# Altium PCB Board.PcbDoc
Units mm, origin at the board's own origin, x right, y up, seen from the top; angles counter-clockwise.
Board outline 100.3 x 90.3 mm, 4 copper layers (L1 (SIGNAL), L2 (GND), L3 (GND), L4 (SIGNAL)), stack 1.586 mm thick; 32 components, 20 nets, 173 pads, 66 vias.
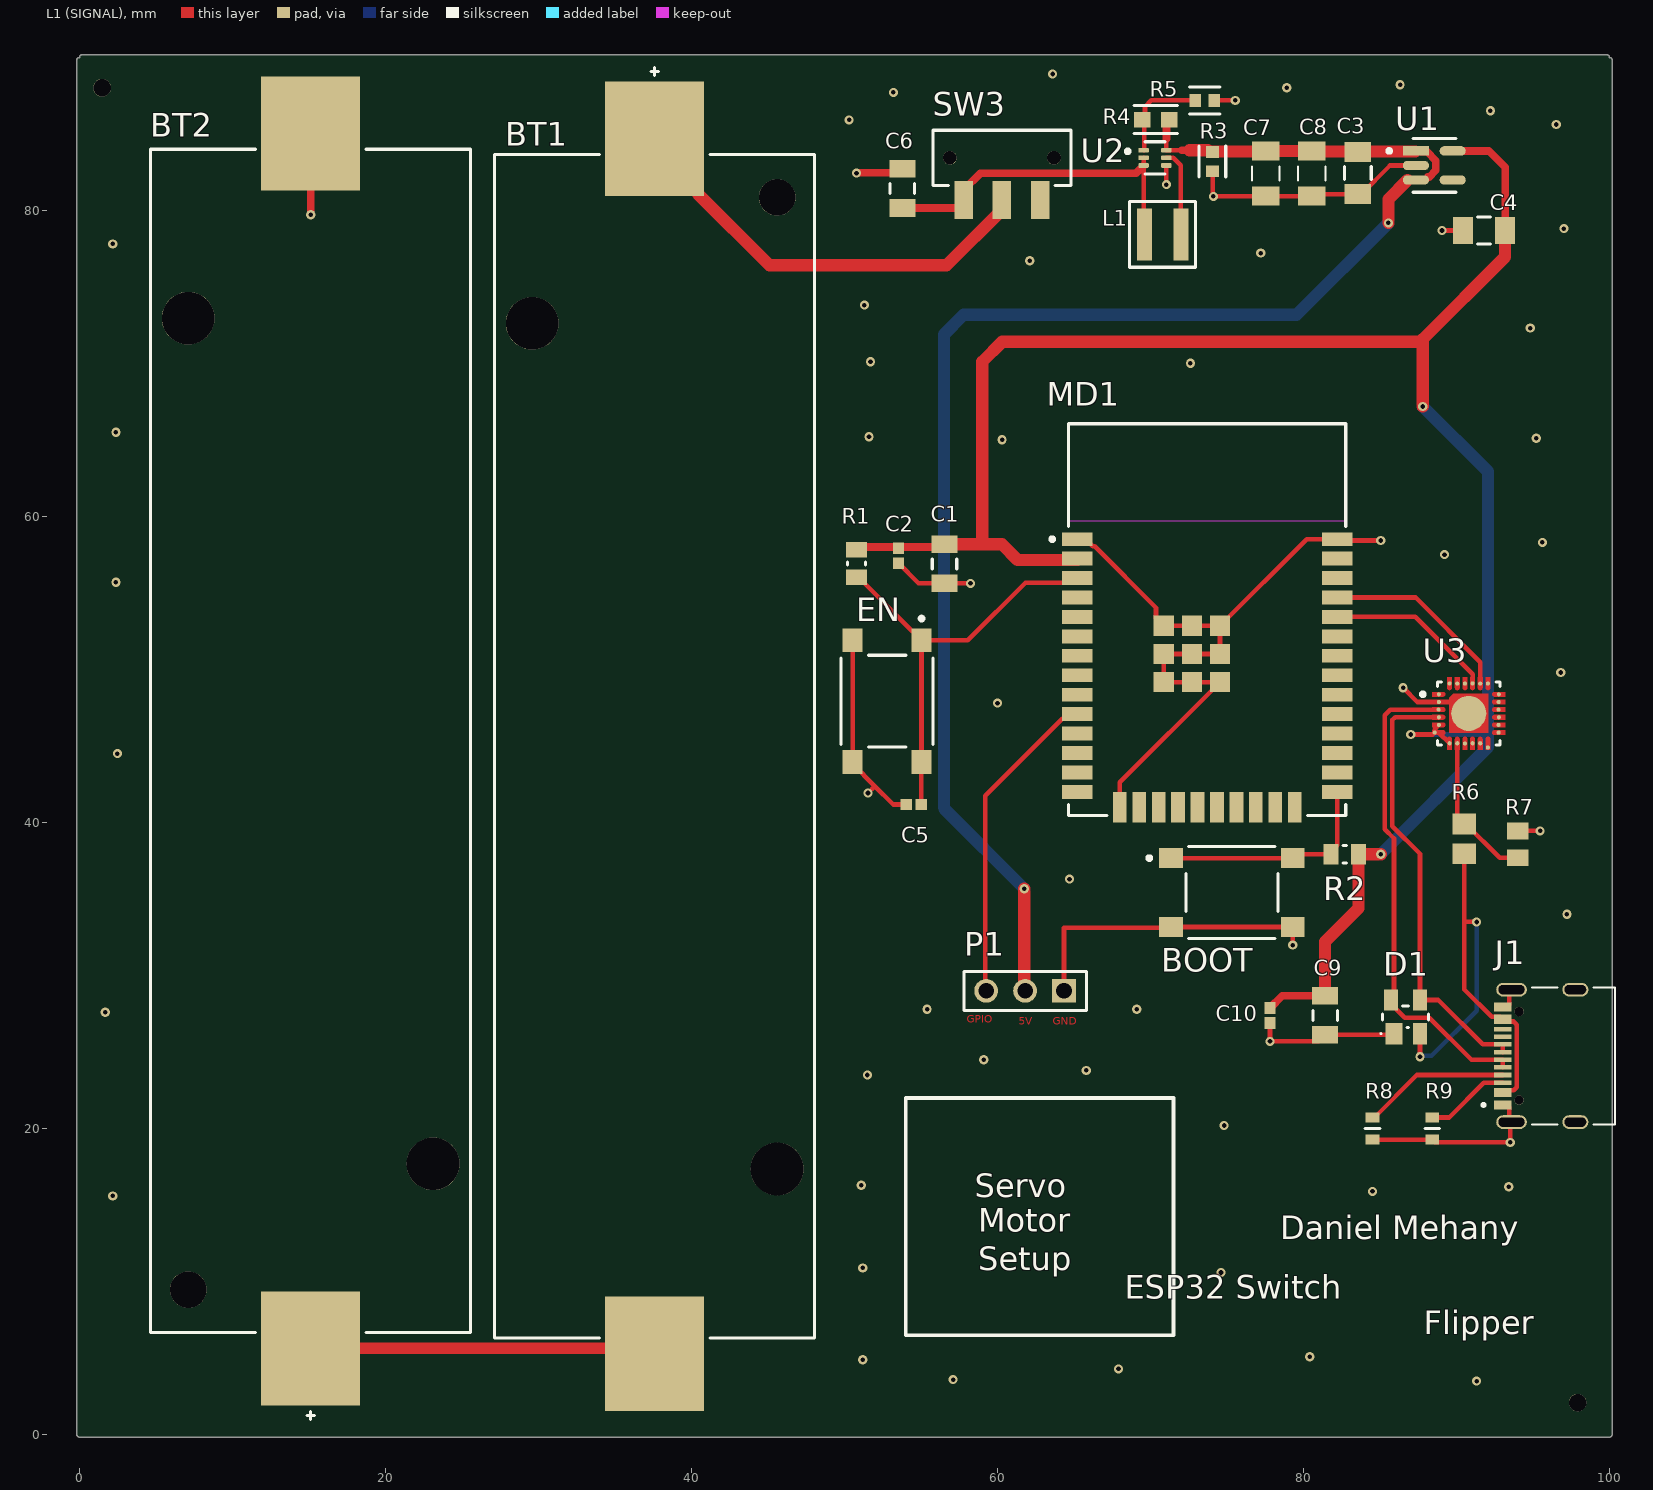
[diagram p0: L1 (SIGNAL) view]
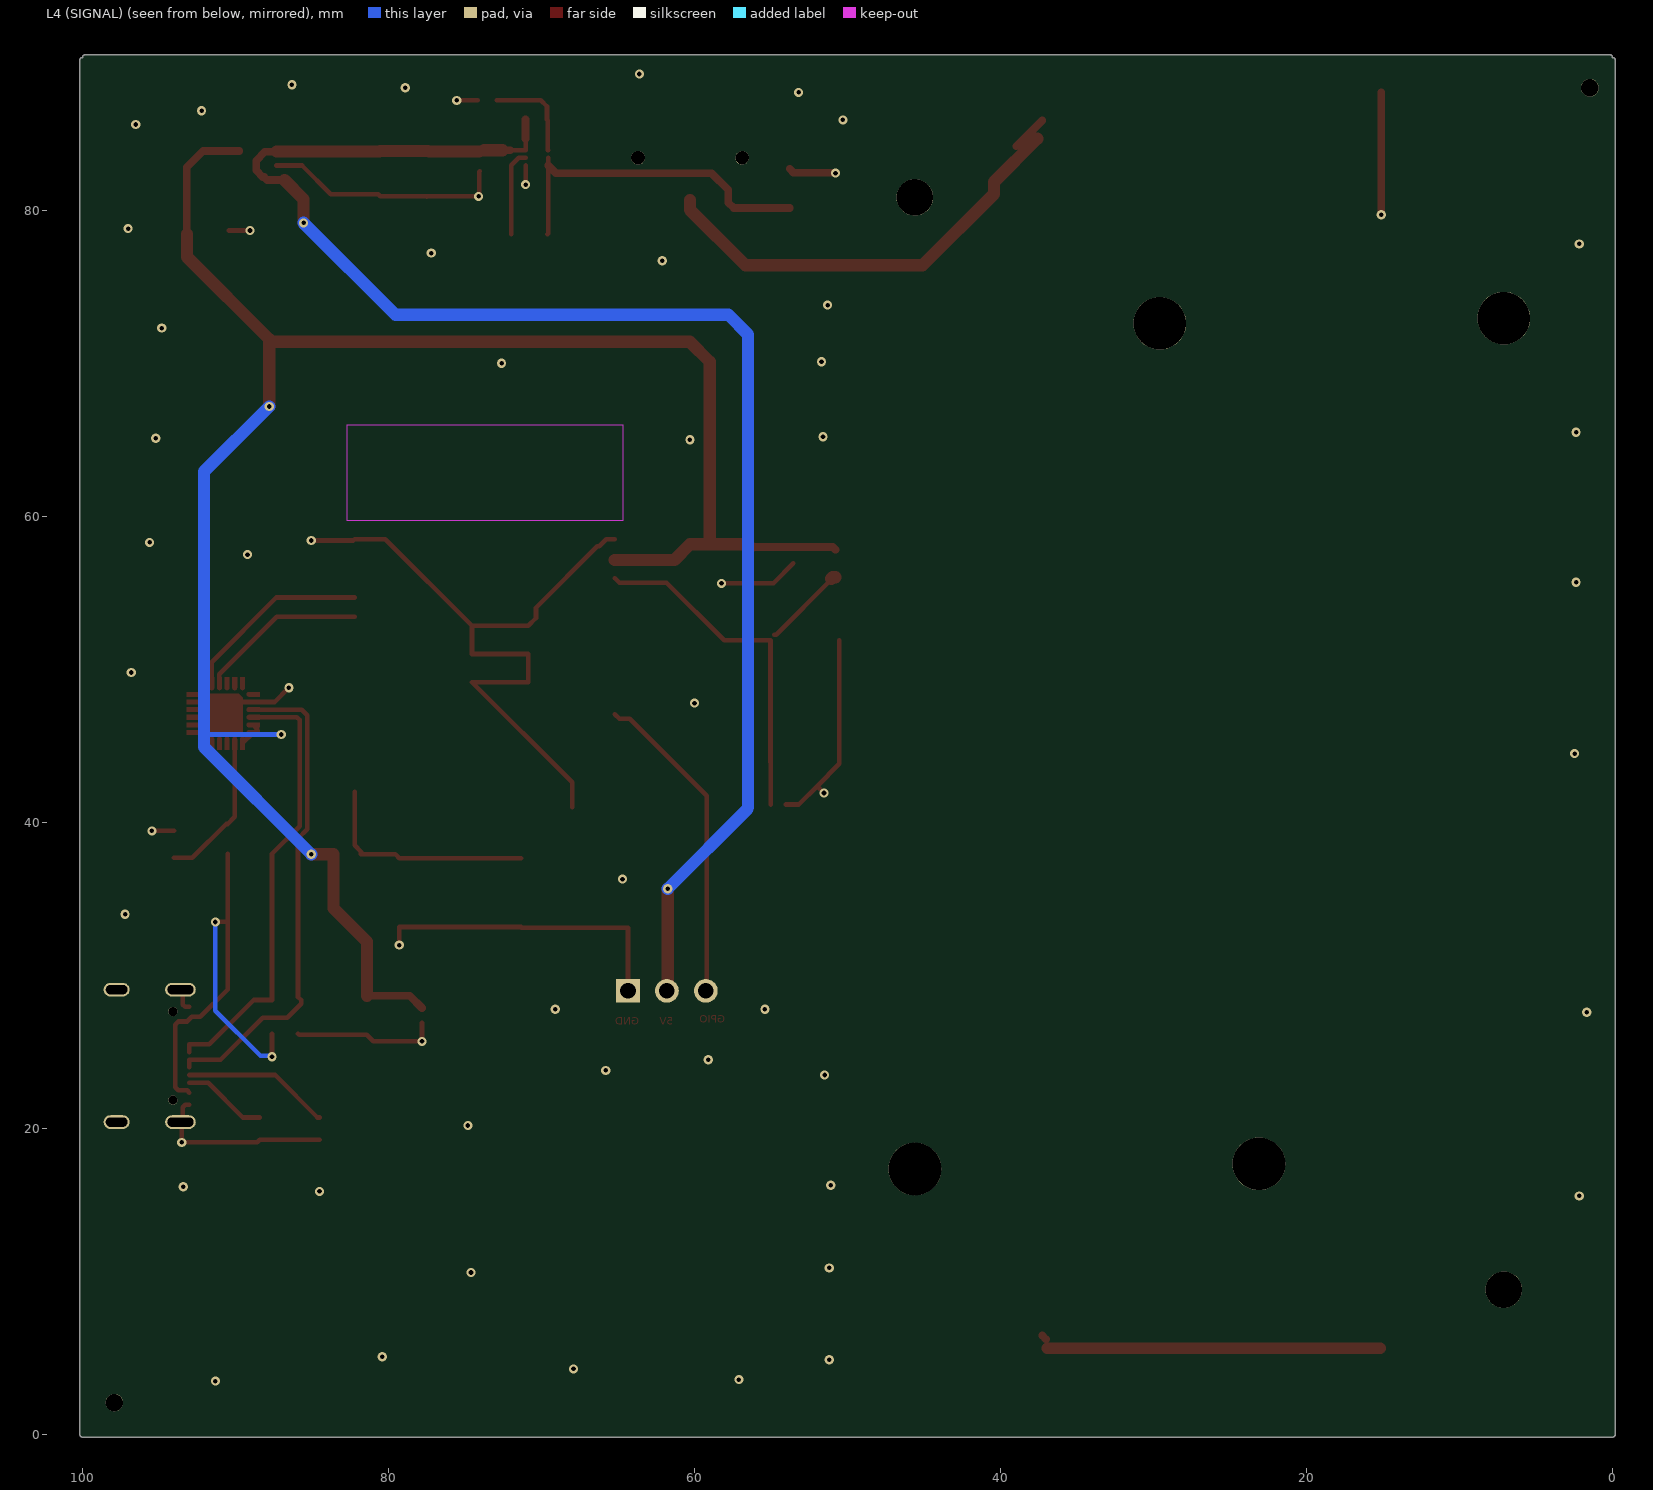
[diagram p1: L4 (SIGNAL) view, seen from below]
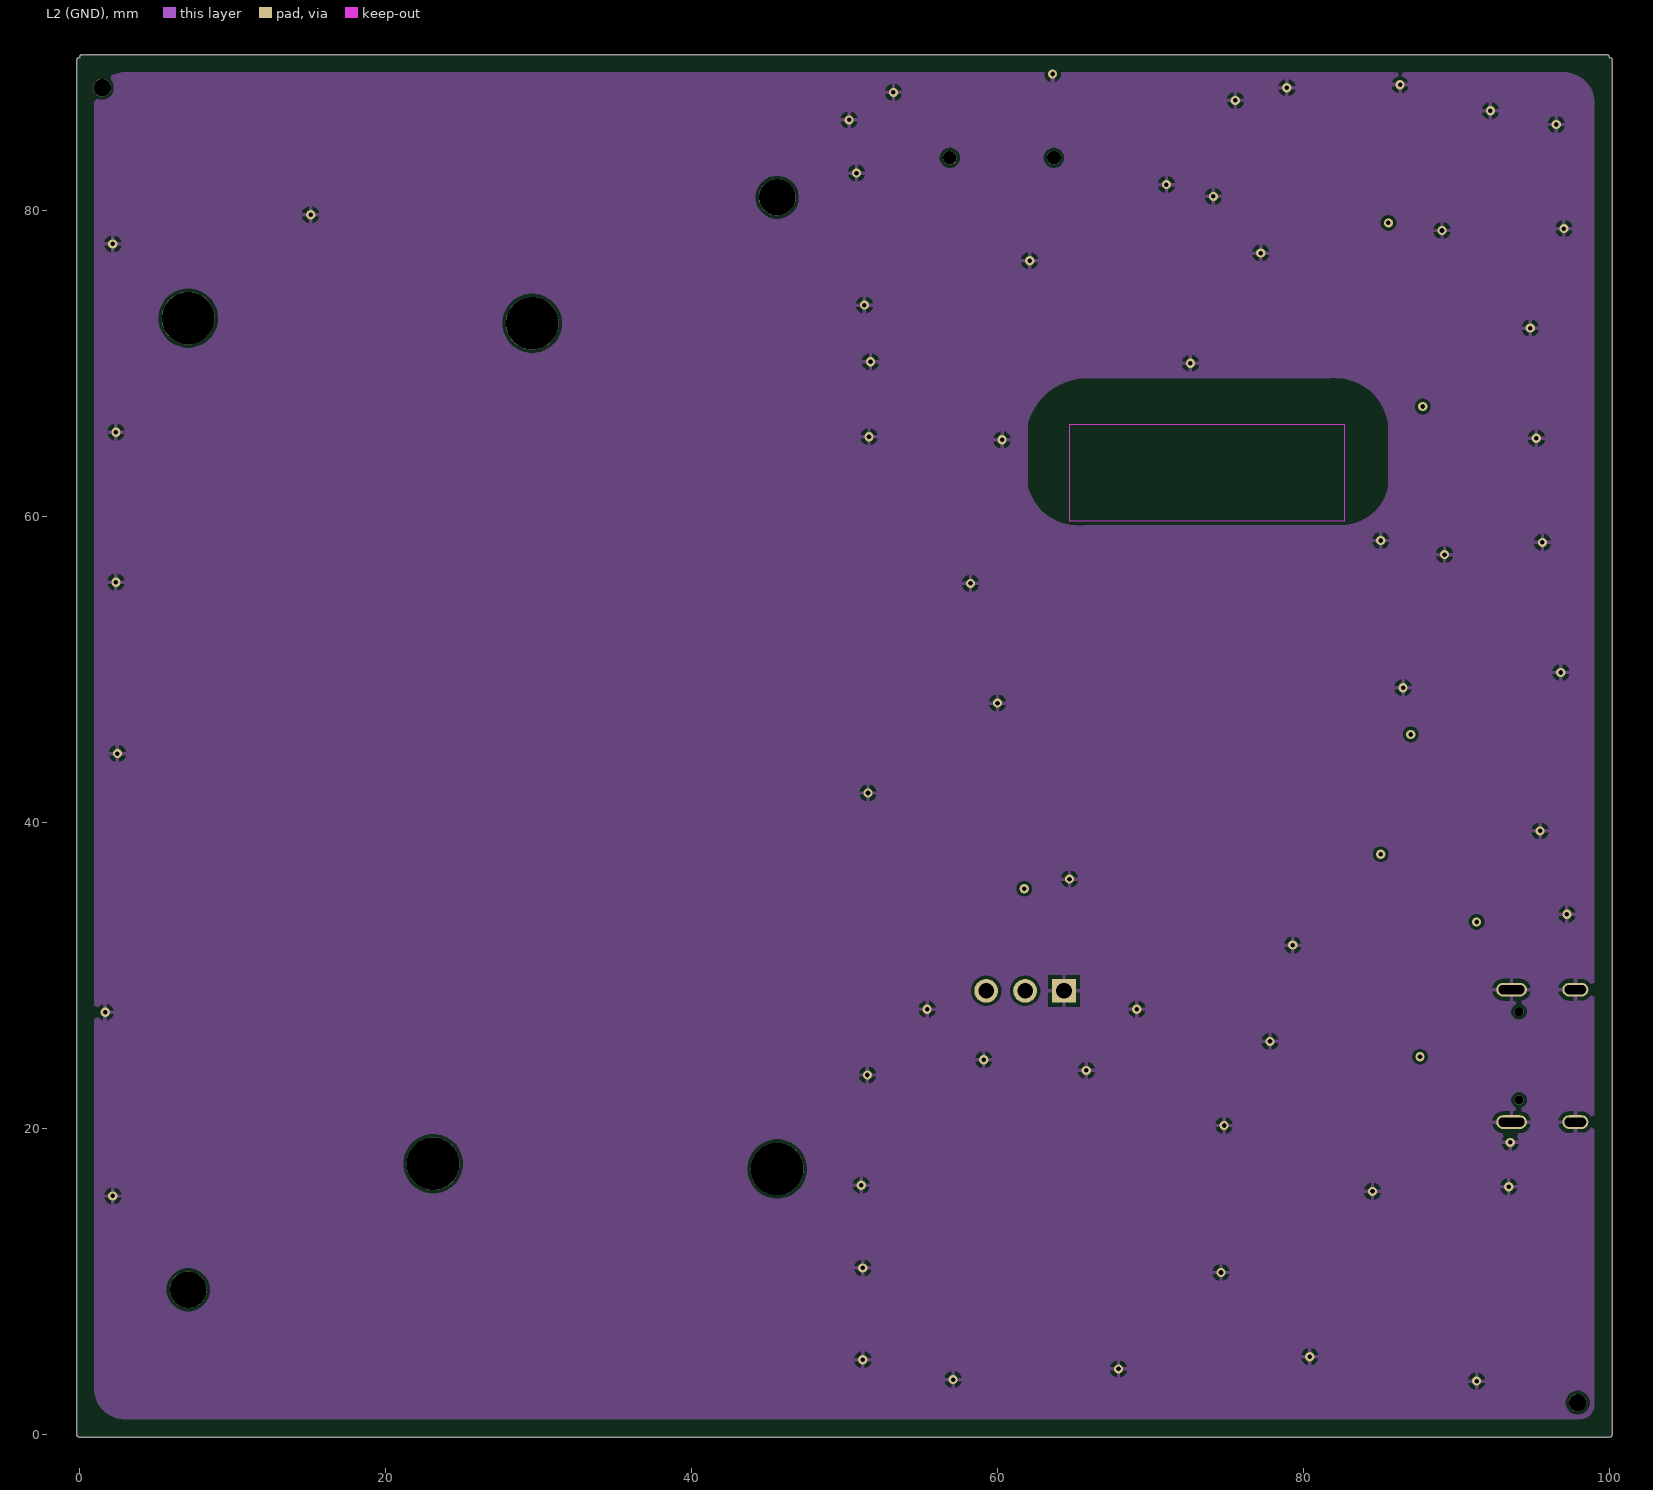
[diagram p2: L2 (GND)]
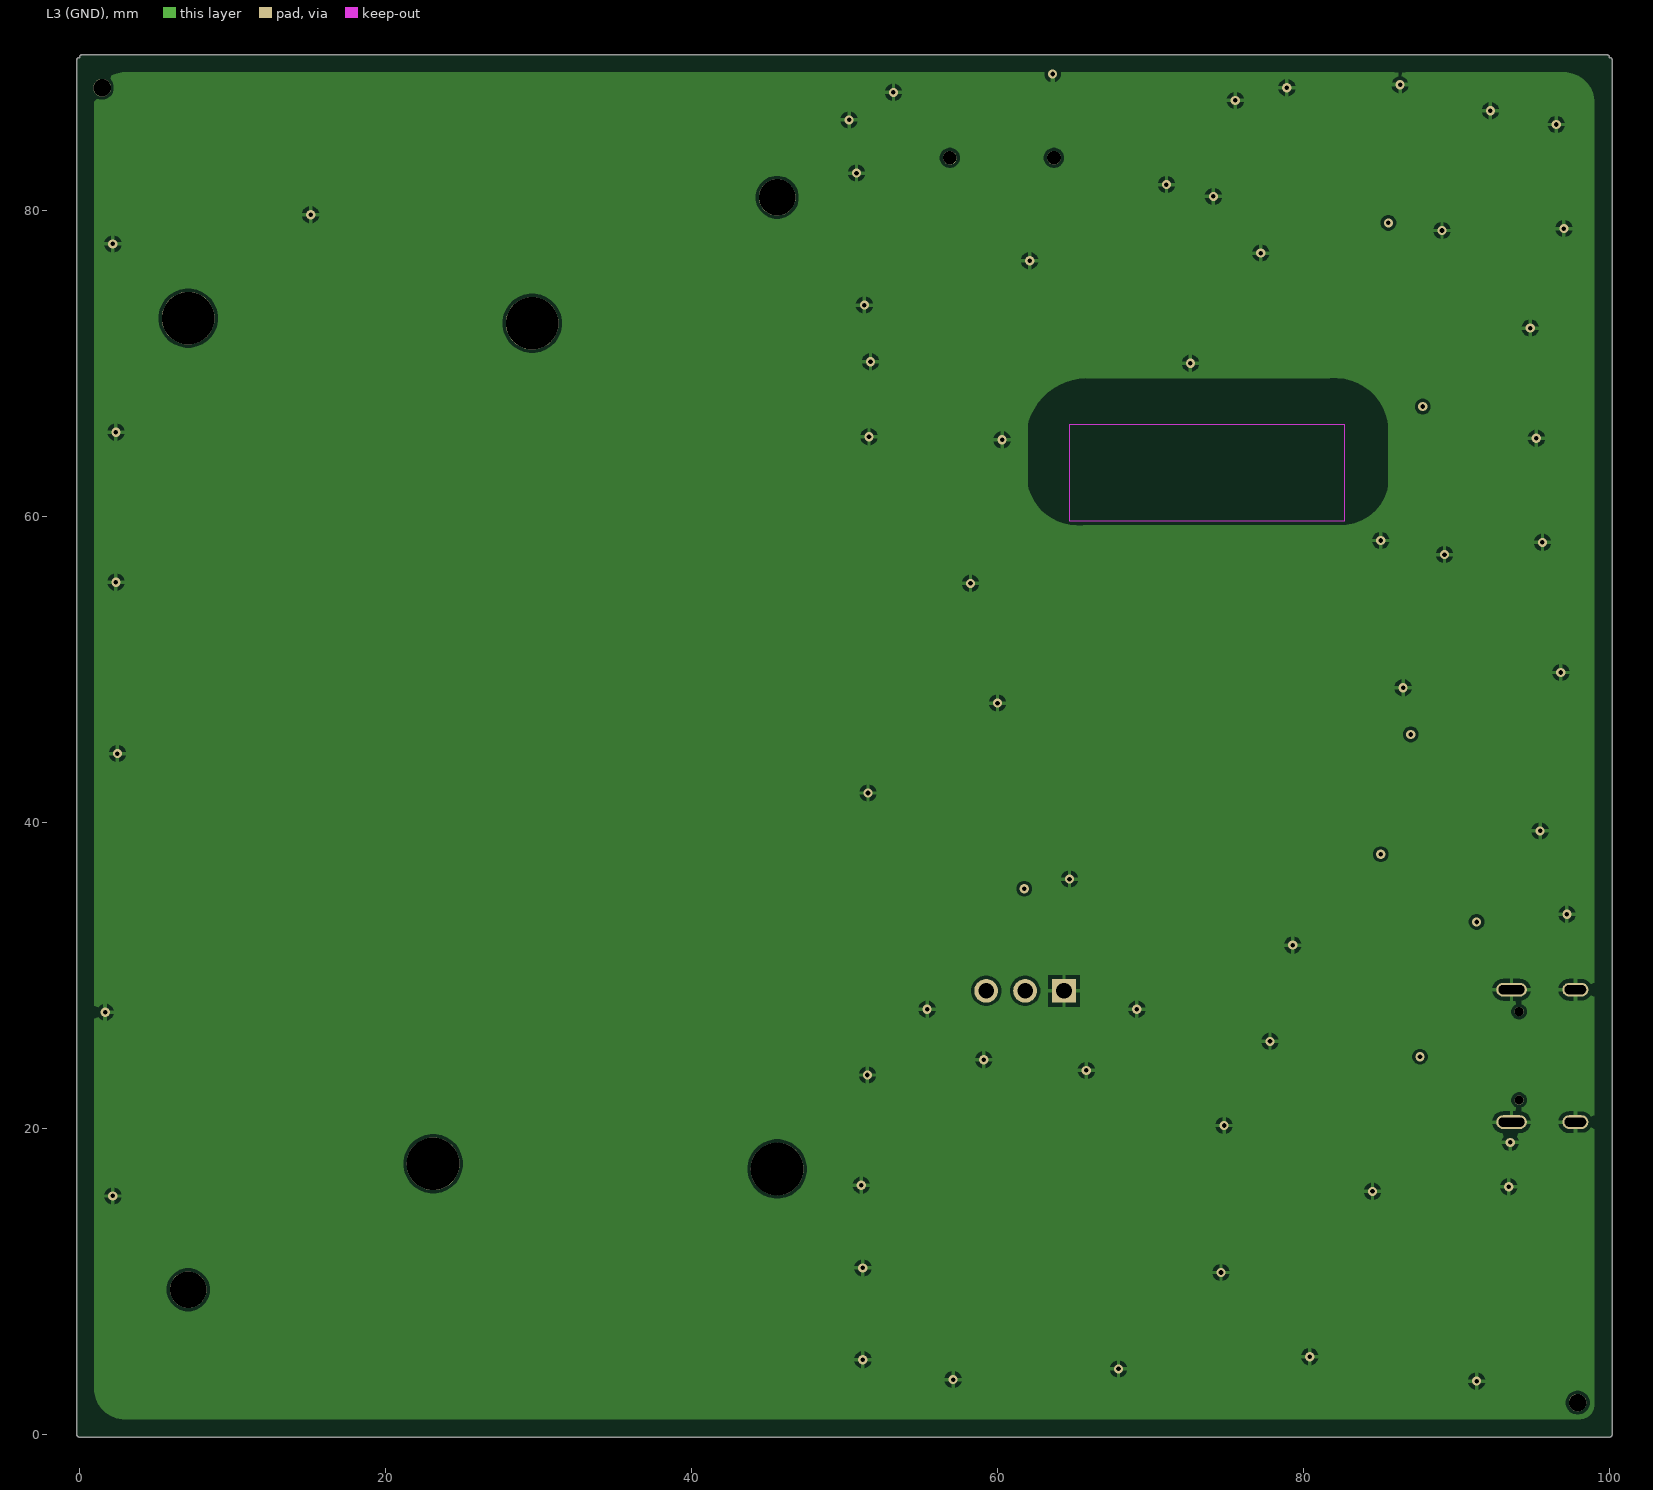
[diagram p3: L3 (GND)]
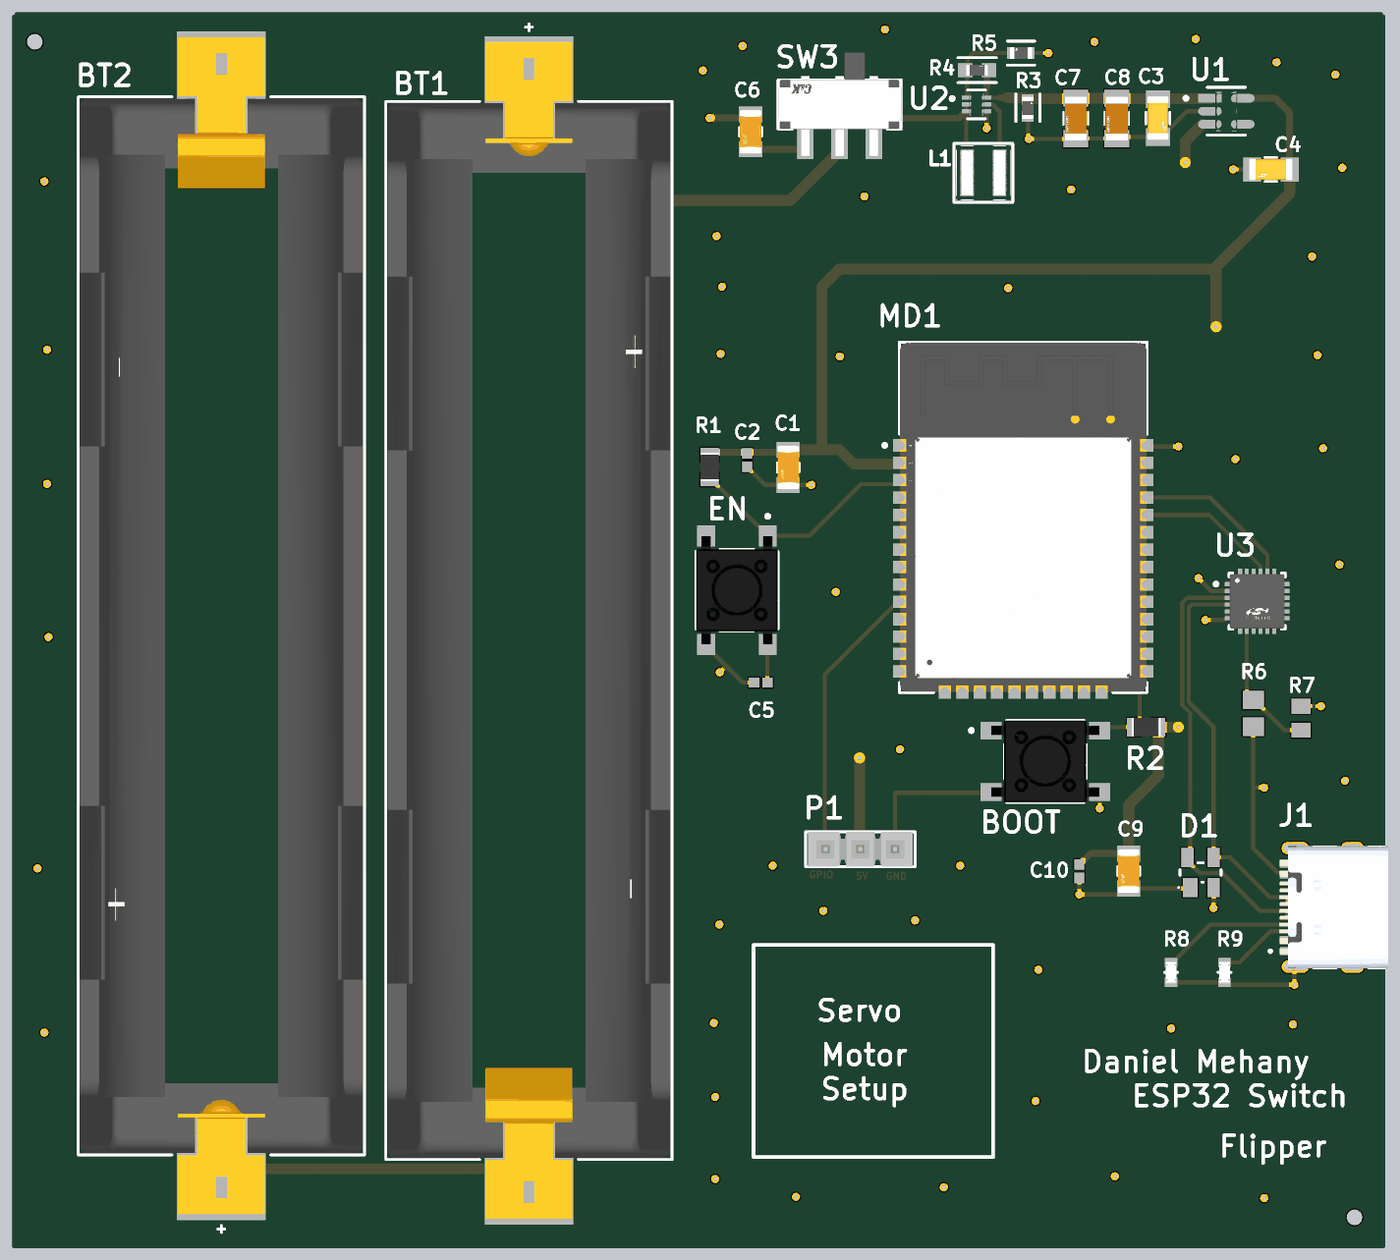
[diagram p4: 3D render of the assembled board from above, using the file's embedded part models]

## Layer stack, top to bottom
Top Solder: solder mask 0.0254, SM-001, Dk 4
L1 (SIGNAL): signal copper 0.035
Dielectric 2: prepreg 0.2104, PP-017, Dk 4.6
L2 (GND): signal copper 0.0152
Dielectric 3: core 1.065, Core-039, Dk 4.6
L3 (GND): signal copper 0.0152
Dielectric 4: prepreg 0.2104, PP-017, Dk 4.6
L4 (SIGNAL): signal copper 0.035
Bottom Solder: solder mask 0.0254, SM-001, Dk 4

## Board outline
0,-0.15 cw(c0,0) -0.15,0 -0.15,89.824 cw(c0,89.824) 0.028,89.972 cw(c0.176,90) 0.176,90.15 99.824,90.15 cw(c99.824,90) 99.975,90 99.972,89.972 cw(c100,89.824) 100.15,89.824 100.15,0 cw(c100,0) 100,-0.15

## Design rules (kind name [scope] priority, off if disabled: settings)
Clearance [All] p1: gap=0.2 ignorepadtopadclearanceinfootprint=FALSE
HoleSize [All] p1: absolutevalues=TRUE maxlimit=3.7 minlimit=0.2 maxpercent=80.000 minpercent=20.000
HoleToHoleClearance [All] p1: gap=0.2 allowstackedmicrovias=TRUE
MinimumSolderMaskSliver [All] p1: minsoldermaskwidth=0.1
PolygonConnect [All] p1: connectstyle=Relief reliefconductorwidth=0.254 reliefentries=4 polygonreliefangle="90 Angle" airgapwidth=0.254
RoutingVias [All] p1: holewidth=0.3 width=0.6 viastyle="Through Hole" minholewidth=0.3 minwidth=0.3 maxholewidth=3.6 maxwidth=3.7
SilkToSilkClearance [All] p1: silktosilkclearance=0.2
SilkToSolderMaskClearance [IsPad] p1: minsilkscreentomaskgap=0.15 clearancetoexposedcopper=TRUE
SolderMaskExpansion [All] p1: expansion=0.102 istentingtop=FALSE
SupplyNets "Schematic Supply Nets" [InNet('GND')] p1: voltage=0.000
UnRoutedNet [All] p1: checkbadconnections=TRUE
Width [All] p1: maxlimit=1 minlimit=0.2 preferedwidth=0.3 midlayer1_minwidth=0.254 midlayer1_maxwidth=0.254 midlayer1_prefwidth=0.254 midlayer2_minwidth=0.254 midlayer2_maxwidth=0.254 midlayer2_prefwidth=0.254 minimp=50.000000 maximp=50.000000 favimp=50.000000
24 further rules are at their usual default settings.

## Classes and differential pairs
component class USB-UART: C9 C10 D1 J1 R6 R7 R8 R9 U3
component class Power+ESP32: BOOT BT1 BT2 C1 C2 C3 C4 C5 C6 C7 C8 EN L1 MD1 P1 R1 R2 R3 R4 R5 SW3 U1 U2

## Components (designator, comment, footprint, x,y, rotation, side; value= is the part's Value field where it differs from the comment)
BOOT "BOOT" FP-PTS645SM43SMTR92LFS-MFG 75.31,35.424 r0 top (schematic designator SW1)
BT1 "1042P" FP-1042P-MFG 37.6,44.987 r90 top
BT2 "1042P" FP-1042P-MFG 15.126,45.325 r270 top
C1 "CL31A106KBHNNNE" FP-CL31-IPC_C 56.535,56.898 r90 top value=10uF
C2 "CL05B104KO5NNNC" CAPC1050X55X23ML05T13 53.535,57.434 r270 top
C3 "CL31B105KBHNNNE" FP-CL31-IPC_B 83.535,82.424 r270 top
C4 "CL31B105KBHNNNE" FP-CL31-IPC_B 91.785,78.674 r180 top
C5 "CL05B104KO5NNNC" CAPC1050X55X23ML05T13 54.525,41.174 r0 top
C6 "CL31A106KBHNNNE" FP-CL31-IPC_C 53.785,81.424 r90 top value=10uF
C7 "CL31A226KAHNNNE" CL31H-0_2_MFG 77.535,82.399 r270 top
C8 "CL31A226KAHNNNE" CL31H-0_2_MFG 80.535,82.399 r270 top
C9 "CL31A106KBHNNNE" FP-CL31-IPC_C 81.4,27.4 r90 top value=10uF
C10 "CL05B104KO5NNNC" CAPC1050X55X23ML05T13 77.8,27.39 r90 top
D1 "SP0503BAHTG" LFUS-SOT143-4_V 86.65,27.3 r90 top
EN "RESET" FP-PTS645SM43SMTR92LFS-MFG 52.785,47.924 r270 top (schematic designator SW2)
J1 "USB-C" HRO_TYPE-C-31-M-12 97.75,24.75 r90 top
L1 "XAL4020-102MEC" FP-XAL4020-102MEC-MFG 70.785,78.424 r0 top value=1uH
MD1 "ESP32-WROOM-32" FP-ESP32-WROOM-32-MFG 73.7,53.249 r0 top
P1 "TSW-103-07-G-S" SMTC-TSW-103-07-X-S 64.34,29 r180 top
R1 "0805W8F1002T5E" RESC2013X60X35NL10T20 50.785,56.924 r90 top value=10kR
R2 "0805W8F1002T5E" RESC2013X60X35NL10T20 82.685,37.924 r180 top value=10kR
R3 "0603WAF1003T5E" FP-CRCW0603-HPe3-IPC_C 74.035,83.174 r90 top value=100kR
R4 "732kR" FP-RC0603-0_55-IPC_A 70.335,85.924 r0 top
R5 "0603WAF1003T5E" FP-CRCW0603-HPe3-IPC_C 73.535,87.174 r180 top value=100kR
R6 "22kR" RESC2013X70X40ML20T20 90.5,38.925 r270 top
R7 "47kR" RESC2013X60X40NL15T20 94,38.575 r270 top
R8 "5.1kR" FP-ERJ3EK-MFG 84.5,20 r90 top
R9 "5.1kR" FP-ERJ3EK-MFG 88.4,20 r90 top
SW3 "JS102011SAQN" FP-JS102011SAQN-MFG 60.285,83.424 r180 top
U1 "AP2112K-3.3TRG1" FP-SOT25-IPC_A 88.535,82.924 r0 top
U2 "TPS61023DRLR" FP-DRL0006A-MFG 70.285,83.424 r0 top
U3 "USB-UART" FP-CP2102N-A02-GQFN24R-MFG 90.785,47.124 r0 top

## Footprints (in the part's own frame and the unit in brackets; to place one, negate y for a bottom-side part, rotate by r counter-clockwise, add the part's x,y. Pads: shape width x height; smd on the part's side, far side on the other; paste and mask are expansions set on the pad)
CAPC1050X55X23ML05T13 [mm] "Chip Capacitor, 2-Leads, Body 1.05x0.55mm, IPC Low Density"
  rect 0.76x0.72 smd: 1(-0.49,0) 2(0.49,0)
  body extent -0.53,-0.28 0.53,0.27, height 0.55
CL31H-0_2_MFG [mm] "Recommended Land Pattern"
  rect 1.25x1.8 smd: 1(-1.475,0) 2(1.475,0)
  silkscreen extent -0.48,-0.9 0.48,0.9, body extent -1.6,-0.8 1.6,0.8, height 1.8
FP-1042P-MFG [mil]
  rect 294x255 smd paste+0 mask+0: 1(-1562.5,0) 2(1562.5,0)
  round 135.83 hole 135.83 unplated paste-99999 mask+0: ""(-1087.5,-315) ""(1087.5,315)
  round 94 hole 94 unplated paste-99999 mask+0: ""(1411.5,-315)
  silkscreen extent -1522,-412 1745,412, body extent -1713,-415 1713,415, height 10
FP-CL31-IPC_B [mm]
  rect 1.305x1.758 smd paste+0 mask+0: 1(-1.376,0) 2(1.376,0)
  silkscreen extent -0.42,-0.88 0.42,0.88, body extent -2.28,-1.13 2.28,1.13, height 0.25
FP-CL31-IPC_C [mm]
  rect 1.154x1.706 smd paste+0 mask+0: 1(-1.276,0) 2(1.276,0)
  silkscreen extent -0.32,-0.8 0.32,0.8, body extent -1.95,-1 1.95,1, height 0.25
FP-CP2102N-A02-GQFN24R-MFG [mm]
  round 0.27 smd paste+0 mask+0: 1(-1.95,1.25) 2(-1.95,0.75) 3(-1.965,0.25) 4(-1.95,-0.25) 5(-1.95,-0.75) 6(-2.225,-1.25) 7(-1.25,-1.95) 8(-0.75,-1.95) 9(-0.25,-1.965) 10(0.25,-1.95) 11(0.75,-1.95) 12(1.25,-2.225) 13(1.95,-1.25) 14(1.95,-0.75) 15(1.965,-0.25) 16(1.95,0.25) 17(1.95,0.75) 18(1.965,1.25) 19(1.25,1.95) 20(0.75,1.95) 21(0.25,1.965) 22(-0.25,1.95) 23(-0.75,1.95) 24(-1.25,1.965)
  round 2.295 smd paste-1000 mask+0: 25(0,0)
  L1 (SIGNAL) region: -1.1,2.375 -1.1,1.675 -1.111,1.618 -1.144,1.569 -1.193,1.536 -1.25,1.525 -1.25,1.525 -1.307,1.536 -1.356,1.569 -1.389,1.618 -1.4,1.675 -1.4,1.675 -1.4,2.375
  L1 (SIGNAL) region: -0.6,2.375 -0.6,1.675 -0.611,1.618 -0.644,1.569 -0.693,1.536 -0.75,1.525 -0.75,1.525 -0.807,1.536 -0.856,1.569 -0.889,1.618 -0.9,1.675 -0.9,1.675 -0.9,2.375
  L1 (SIGNAL) region: -0.1,2.375 -0.1,1.675 -0.111,1.618 -0.144,1.569 -0.193,1.536 -0.25,1.525 -0.25,1.525 -0.307,1.536 -0.356,1.569 -0.389,1.618 -0.4,1.675 -0.4,1.675 -0.4,2.375
  L1 (SIGNAL) region: 0.4,2.375 0.4,1.675 0.389,1.618 0.356,1.569 0.307,1.536 0.25,1.525 0.25,1.525 0.193,1.536 0.144,1.569 0.111,1.618 0.1,1.675 0.1,1.675 0.1,2.375
  L1 (SIGNAL) region: 0.9,2.375 0.9,1.675 0.889,1.618 0.856,1.569 0.807,1.536 0.75,1.525 0.75,1.525 0.693,1.536 0.644,1.569 0.611,1.618 0.6,1.675 0.6,1.675 0.6,2.375
  L1 (SIGNAL) region: 1.4,2.375 1.4,1.675 1.389,1.618 1.356,1.569 1.307,1.536 1.25,1.525 1.25,1.525 1.193,1.536 1.144,1.569 1.111,1.618 1.1,1.675 1.1,1.675 1.1,2.375
  L1 (SIGNAL) region: 1.1,-2.375 1.1,-1.675 1.111,-1.618 1.144,-1.569 1.193,-1.536 1.25,-1.525 1.25,-1.525 1.307,-1.536 1.356,-1.569 1.389,-1.618 1.4,-1.675 1.4,-1.675 1.4,-2.375
  L1 (SIGNAL) region: 0.6,-2.375 0.6,-1.675 0.611,-1.618 0.644,-1.569 0.693,-1.536 0.75,-1.525 0.75,-1.525 0.807,-1.536 0.856,-1.569 0.889,-1.618 0.9,-1.675 0.9,-1.675 0.9,-2.375
  L1 (SIGNAL) region: 0.1,-2.375 0.1,-1.675 0.111,-1.618 0.144,-1.569 0.193,-1.536 0.25,-1.525 0.25,-1.525 0.307,-1.536 0.356,-1.569 0.389,-1.618 0.4,-1.675 0.4,-1.675 0.4,-2.375
  L1 (SIGNAL) region: -0.4,-2.375 -0.4,-1.675 -0.389,-1.618 -0.356,-1.569 -0.307,-1.536 -0.25,-1.525 -0.25,-1.525 -0.193,-1.536 -0.144,-1.569 -0.111,-1.618 -0.1,-1.675 -0.1,-1.675 -0.1,-2.375
  L1 (SIGNAL) region: -0.9,-2.375 -0.9,-1.675 -0.889,-1.618 -0.856,-1.569 -0.807,-1.536 -0.75,-1.525 -0.75,-1.525 -0.693,-1.536 -0.644,-1.569 -0.611,-1.618 -0.6,-1.675 -0.6,-1.675 -0.6,-2.375
  L1 (SIGNAL) region: -1.4,-2.375 -1.4,-1.675 -1.389,-1.618 -1.356,-1.569 -1.307,-1.536 -1.25,-1.525 -1.25,-1.525 -1.193,-1.536 -1.144,-1.569 -1.111,-1.618 -1.1,-1.675 -1.1,-1.675 -1.1,-2.375
  L1 (SIGNAL) region: 2.375,1.1 1.675,1.1 1.618,1.111 1.569,1.144 1.536,1.193 1.525,1.25 1.525,1.25 1.536,1.307 1.569,1.356 1.618,1.389 1.675,1.4 1.675,1.4 2.375,1.4
  L1 (SIGNAL) region: 2.375,0.6 1.675,0.6 1.618,0.611 1.569,0.644 1.536,0.693 1.525,0.75 1.525,0.75 1.536,0.807 1.569,0.856 1.618,0.889 1.675,0.9 1.675,0.9 2.375,0.9
  L1 (SIGNAL) region: 2.375,0.1 1.675,0.1 1.618,0.111 1.569,0.144 1.536,0.193 1.525,0.25 1.525,0.25 1.536,0.307 1.569,0.356 1.618,0.389 1.675,0.4 1.675,0.4 2.375,0.4
  L1 (SIGNAL) region: 2.375,-0.4 1.675,-0.4 1.618,-0.389 1.569,-0.356 1.536,-0.307 1.525,-0.25 1.525,-0.25 1.536,-0.193 1.569,-0.144 1.618,-0.111 1.675,-0.1 1.675,-0.1 2.375,-0.1
  L1 (SIGNAL) region: 2.375,-0.9 1.675,-0.9 1.618,-0.889 1.569,-0.856 1.536,-0.807 1.525,-0.75 1.525,-0.75 1.536,-0.693 1.569,-0.644 1.618,-0.611 1.675,-0.6 1.675,-0.6 2.375,-0.6
  L1 (SIGNAL) region: 2.375,-1.4 1.675,-1.4 1.618,-1.389 1.569,-1.356 1.536,-1.307 1.525,-1.25 1.525,-1.25 1.536,-1.193 1.569,-1.144 1.618,-1.111 1.675,-1.1 1.675,-1.1 2.375,-1.1
  L1 (SIGNAL) region: -2.375,-1.1 -1.675,-1.1 -1.618,-1.111 -1.569,-1.144 -1.536,-1.193 -1.525,-1.25 -1.525,-1.25 -1.536,-1.307 -1.569,-1.356 -1.618,-1.389 -1.675,-1.4 -1.675,-1.4 -2.375,-1.4
  L1 (SIGNAL) region: -2.375,-0.6 -1.675,-0.6 -1.618,-0.611 -1.569,-0.644 -1.536,-0.693 -1.525,-0.75 -1.525,-0.75 -1.536,-0.807 -1.569,-0.856 -1.618,-0.889 -1.675,-0.9 -1.675,-0.9 -2.375,-0.9
  L1 (SIGNAL) region: -2.375,-0.1 -1.675,-0.1 -1.618,-0.111 -1.569,-0.144 -1.536,-0.193 -1.525,-0.25 -1.525,-0.25 -1.536,-0.307 -1.569,-0.356 -1.618,-0.389 -1.675,-0.4 -1.675,-0.4 -2.375,-0.4
  L1 (SIGNAL) region: -2.375,0.4 -1.675,0.4 -1.618,0.389 -1.569,0.356 -1.536,0.307 -1.525,0.25 -1.525,0.25 -1.536,0.193 -1.569,0.144 -1.618,0.111 -1.675,0.1 -1.675,0.1 -2.375,0.1
  L1 (SIGNAL) region: -2.375,0.9 -1.675,0.9 -1.618,0.889 -1.569,0.856 -1.536,0.807 -1.525,0.75 -1.525,0.75 -1.536,0.693 -1.569,0.644 -1.618,0.611 -1.675,0.6 -1.675,0.6 -2.375,0.6
  L1 (SIGNAL) region: -2.375,1.4 -1.675,1.4 -1.618,1.389 -1.569,1.356 -1.536,1.307 -1.525,1.25 -1.525,1.25 -1.536,1.193 -1.569,1.144 -1.618,1.111 -1.675,1.1 -1.675,1.1 -2.375,1.1
  L1 (SIGNAL) region: -1.275,1.025 -1.025,1.275 1.275,1.275 1.275,-1.275 -1.275,-1.275 -1.275,1.025
  silkscreen extent -3.12,-2.05 2.05,2.05, body extent -2.48,-2.48 2.48,2.48, height 0.25
FP-CRCW0603-HPe3-IPC_C [mm]
  rect 0.758x0.862 smd paste+0 mask+0: 1(-0.627,0) 2(0.627,0)
  silkscreen extent -1.01,-0.87 1.01,0.87, body extent -1.11,-0.58 1.11,0.58, height 0.25
FP-DRL0006A-MFG [mm]
  rrect33% 0.67x0.3 smd paste+0 mask+0: 1(-0.74,0.5) 2(-0.74,0) 3(-0.74,-0.5) 4(0.74,-0.5) 5(0.74,0) 6(0.74,0.5)
  silkscreen extent -1.9,-1.05 0.65,1.05, body extent -1.17,-1.1 1.17,1.1, height 0.25
FP-ERJ3EK-MFG [mm]
  rect 0.65x0.9 smd paste+0 mask+0: 1(-0.725,0) 2(0.725,0)
  silkscreen extent 0,-0.48 0,0.48, body extent -1.15,-0.58 1.15,0.58, height 0.25
FP-ESP32-WROOM-32-MFG [mm]
  rect 2x0.9 smd paste+0 mask+0: 1(-8.5,5.26) 2(-8.5,3.99) 3(-8.5,2.72) 4(-8.5,1.45) 5(-8.5,0.18) 6(-8.5,-1.09) 7(-8.5,-2.36) 8(-8.5,-3.63) 9(-8.5,-4.9) 10(-8.5,-6.17) 11(-8.5,-7.44) 12(-8.5,-8.71) 13(-8.5,-9.98) 14(-8.5,-11.25) 25(8.5,-11.25) 26(8.5,-9.98) 27(8.5,-8.71) 28(8.5,-7.44) 29(8.5,-6.17) 30(8.5,-4.9) 31(8.5,-3.63) 32(8.5,-2.36) 33(8.5,-1.09) 34(8.5,0.18) 35(8.5,1.45) 36(8.5,2.72) 37(8.5,3.99) 38(8.5,5.26)
  rect 0.9x2 smd paste+0 mask+0: 15(-5.715,-12.25) 16(-4.445,-12.25) 17(-3.175,-12.25) 18(-1.905,-12.25) 19(-0.635,-12.25) 20(0.635,-12.25) 21(1.905,-12.25) 22(3.175,-12.25) 23(4.445,-12.25) 24(5.715,-12.25)
  rect 1.33x1.33 smd paste+0 mask+0: 39(-2.835,-4.075) 39(-2.835,-2.24) 39(-2.835,-0.405) 39(-1,-4.075) 39(-1,-2.24) 39(-1,-0.405) 39(0.835,-4.075) 39(0.835,-2.24) 39(0.835,-0.405)
  Keep-Out Layer region: -9,6.45 9,6.45 9,12.75 -9,12.75
  Keep-Out Layer region: -9,6.45 9,6.45 9,12.75 -9,12.75
  silkscreen extent -10.25,-12.8 9.05,12.8, body extent -9.6,-13.35 9.6,12.9, height 0.25
FP-JS102011SAQN-MFG [mm]
  rect 1.2x2.5 smd paste+0 mask+0: 1(-2.5,2.75) 2(0,2.75) 3(2.5,2.75)
  round 0.9 hole 0.9 unplated paste-2539.97 mask+0: ""(-3.4,0) ""(3.4,0)
  silkscreen extent -4.5,-1.8 4.5,1.8, body extent -4.6,-3.9 4.6,4.1, height 0.25
FP-PTS645SM43SMTR92LFS-MFG [mm]
  rect 1.55x1.3 smd paste+0 mask+0: 1(-3.975,2.25) 2(3.975,2.25) 3(-3.975,-2.25) 4(3.975,-2.25)
  silkscreen extent -5.52,-3 3,3, body extent -4.85,-3.1 4.85,3.1, height 0.25
FP-RC0603-0_55-IPC_A [mm]
  rect 1.059x1.012 smd paste+0 mask+0: 1(-0.877,0) 2(0.877,0)
  silkscreen extent -1.41,-0.91 1.41,0.91, body extent -1.91,-1.01 1.91,1.01, height 0.25
FP-SOT25-IPC_A [mm]
  rect 1.707x0.616 smd paste+0 mask+0: 1(-1.201,0.95)
  rrect100% 1.707x0.616 smd paste+0 mask+0: 2(-1.201,0) 3(-1.201,-0.95) 4(1.201,-0.95) 5(1.201,0.95)
  silkscreen extent -3.08,-1.75 1.4,1.75, body extent -2.55,-2 2.55,2, height 0.25
FP-XAL4020-102MEC-MFG [mm]
  rect 0.98x3.4 smd paste+0 mask+0: 1(-1.185,0) 2(1.185,0)
  silkscreen extent -2.15,-2.15 2.15,2.15, body extent -2.25,-2.25 2.25,2.25, height 0.25
HRO_TYPE-C-31-M-12 [mm]
  rect 0.6x1.14 smd mask+0.05: A1_B12(-3.2,4.75) A4_B9(-2.4,4.75) B1_A12(3.2,4.75) B4_A9(2.4,4.75)
  rect 0.3x1.14 smd mask+0.05: A5(-1.25,4.75) A6(-0.25,4.75) A7(0.25,4.75) A8(1.25,4.75) B5(1.75,4.75) B6(0.75,4.75) B7(-0.75,4.75) B8(-1.75,4.75)
  oval 0.9x2 hole 0.6 slot 1.7 at 90 deg: S1(-4.325,4.17) S2(4.325,4.17)
  oval 0.9x1.7 hole 0.6 slot 1.4 at 90 deg: S3(-4.325,0) S4(4.325,0)
  round 0.6 hole 0.6 unplated: ""(-2.89,3.68) ""(2.89,3.68)
  silkscreen extent -4.47,-2.6 4.47,6.1, body extent -4.47,-2.6 4.47,5.31, height 3.31
LFUS-SOT143-4_V [mm] "SOT143, 4-Leads, Body 3.04x1.4mm, Pitch 1.90mm"
  rect 1.4x1.1 smd: 1(-1.1,0.75)
  rect 1.4x0.9 smd: 2(-1.1,-0.95) 3(1.1,-0.95) 4(1.1,0.95)
  silkscreen extent -1.15,-1.5 0.7,1.65, body extent -0.7,-1.52 0.7,1.52, height 1.22
RESC2013X60X35NL10T20 [mm] "Chip Resistor, 2-Leads, Body 2.1x1.35mm, IPC Medium Density"
  rect 1x1.35 smd: 1(-0.9,0) 2(0.9,0)
  silkscreen extent -0.1,-0.58 0.1,0.58, body extent -1.05,-0.68 1.05,0.67, height 0.6
RESC2013X60X40NL15T20 [mm] "Chip Resistor, 2-Leads, Body 2.00x1.25mm, IPC Medium Density"
  rect 1.1x1.4 smd: 1(-0.875,0) 2(0.875,0)
  body extent -1.07,-0.7 1.08,0.7, height 0.6
RESC2013X70X40ML20T20 [mm] "Chip Resistor, 2-Leads, Body 2.00x1.25mm, IPC Low Density"
  rect 1.35x1.55 smd: 1(-0.975,0) 2(0.975,0)
  body extent -1.1,-0.72 1.1,0.72, height 0.7
SMTC-TSW-103-07-X-S [mm] ".025 SQ Post Terminal Strip Assembly, 1x3 Pins, Vertical, 2.54mm Pitch, Male"
  rect 1.55x1.55 hole 1.02: 1(0,0)
  round 1.55 hole 1.02: 2(2.54,0) 3(5.08,0)
  silkscreen extent -1.46,-1.27 6.54,1.27, body extent -1.27,-1.27 6.35,1.27, height 8.38

## Part data
BOOT EN: library part CMP-2000-05160-2, "SWITCH TACTILE SPST-NO 0.05A 12V", Case/Package=SMD/SMT, Color=Black, Contact Resistance=100mR, Current Rating=50mA, JLCPCB Part #=C318884, Max Operating Temperature=60°C, Max Voltage Rating (DC)=12V, Min Operating Temperature=-20°C, Operating Force=160gf, Package Quantity=1, Actuator Length=0.85mm, Actuator Material=Nylon, Actuator Type=Standard, Contact Material=Silver, Contact Plating=Silver, Depth=9mm, Illumination Type=Non-Illuminated, Lead Free="Lead Free", Length=6mm, Max Current Rating=50mA, Mechanical Life=100000Cycles, Mount="Surface Mount", Orientation=Straight, Packaging="Tape and Reel", REACH SVHC="No SVHC", Switch Function=Off-Mom, Termination="Gull Wing", Throw Configuration=SPST, Voltage Rating (DC)=12V
BT1 BT2: library part CMP-19636-000019-1, "BATTERY HOLDER 18650 SMD TAB", JLCPCB Part #=C5183865, Max Operating Temperature=145°C, Min Operating Temperature=-50°C, Package Quantity=200, Lead Free="Lead Free", Mount="Surface Mount", Number of Cells=1, Packaging=Tray, Termination=SMD/SMT
C1 C6 C9: library part CMP-13271-000016-1, "CAP CER 10UF 50V X5R 1206", Capacitance=10uF, JLCPCB Part #=C13585, Manufacturer=Samsung, Package=CL31, Temperature="-55°C to +85°C", Temperature Characteristic=X5R, Temperature Coefficient=15%, Temperature Range High=+85°C, Temperature Range Low=-55°C, Tolerance=10%, Voltage=50V, Automotive=No, Category=Cap, ComponentLink2Description=Datasheet, ComponentLink2URL=http://www.samsungsem.com/kr/support/product-search/mlcc/__icsFiles/afieldfile/2018/06/21/CL31A106KBHNNNE.pdf, Device Class L1="Passive Components", Device Class L2=Capacitors, Device Class L3="Ceramic Capacitors", Digikey Description="CAP CER 10UF 50V X5R 1206", Height=1.8mm, Ipc Land Pattern Name=CAPC320160X160, Lead Free=Yes, Manufacturer Part Number=CL31A106KBHNNNE, Material=Ceramic, Octopart=https://octopart.com/cl31a106kbhnnne-samsung-19832778, RoHS=TRUE, Voltage Rating=50V
C2 C5 C10: library part CMP-2000-05439-1, "Chip Capacitor, 100 nF, +/- 10%, 16 V, -55 to 125 degC, 0402 (1005 Metric), RoHS, Tape and Reel", Capacitance=100000pF, Case Size/Dimension=0402, Dielectric=X7R, JLCPCB Part #=C1525, Manufacturer="Samsung Electro-Mechanics", Rated Voltage=16V, Tolerance (%)=±10%, cap=0.1uF, Datasheet URL=https://datasheet.ciiva.com/29198/458718-da-01-en-vs-kondensator-0402-29198423.pdf, Datasheet Version=Nov-10, Manufacturer URL=http://www.samsungsem.com/global/index.jsp
C3 C4: library part CMP-13271-001662-1, "Cap Ceramic 1uF 50V X7R ±10% SMD 1206 +125°C Embossed T/R", Capacitance=1uF, Case Code (Imperial)=1206, Case Code (Metric)=3216, Dielectric=X7R, JLCPCB Part #=C1848, Max Operating Temperature=125°C, Min Operating Temperature=-55°C, Package Quantity=1, Tolerance=10%, Voltage=50V, Case/Package=1206, Contact Plating=Tin, Depth=1.6mm, Height=1.6mm, Lead Free="Lead Free", Length=3.2mm, Material=Ceramic, Mount="Surface Mount", Packaging="Tape and Reel", Radiation Hardening=No, Thickness=0.071inch, Voltage Rating=50V, Voltage Rating (DC)=50V, Width=0.063inch
C7 C8: library part CMP-13271-000012-2, "Ceramic Capacitor, Multilayer, Ceramic, 25V, 10% +Tol, 10% -Tol, X5R, 15% TC, 22uF, Surface Mount, 1206", Capacitance=22µF, Case/Package=1206, Dielectric=X5R, JLCPCB Part #=C12891, Max Operating Temperature=85°C, Min Operating Temperature=-55°C, Tolerance=10%, Voltage Rating=25V, ComponentLink2Description="Datasheet URL", ComponentLink2URL=https://product.samsungsem.com/mlcc/CL31A226KAHNNN.do, Height=1.8mm, HelpURL=https://product.samsungsem.com/mlcc/CL31A226KAHNNN.do, Material=Ceramic, RoHS=Compliant, Voltage Rating (DC)=25V
D1: library part CMP-2000-05191-1, "TVS Diode Array, 30 pF, 30 KV, -40 to 85 degC, 4-Pin SOT143, RoHS, Tape and Reel", Capacitance Value=30pF, Clamping Voltage=8V, JLCPCB Part #=C7074, Leakage Current=0.1uA, Manufacturer=Littelfuse, Operating Temp Range=-40Cto85C, Operating Temperature Classification=Industrial, Operating Temperature Max Deg. C=85C, Operating Temperature Min Deg. C=-40C, Package / Case=SOT-143, Reverse Stand-off Voltage=5.5(Min)V, Working Voltage=5.5V, Working Voltage (Max)=5.5V(Min), Clamping Voltage (Max)=8V, Configuration=Triple, Datasheet URL=https://datasheet.ciiva.com/15143/getdatasheetpartid-116020-15143550.pdf, Datasheet Version=Dec-13, Direction Type=Uni-Directional, Leakage Current (Max)=0.1uA, Manufacturer URL=http://www.littelfuse.com/, Mounting=SurfaceMount, Mounting Style=SurfaceMount, Number of Elements=3, Package Type=SOT-143, Packaging=TapeandReel, Pin Count=3+Tab, Polarity=Uni-Directional, Product Depth (mm)=1.4mm, Product Height (mm)=1.05mm, Product Length (mm)=3.04mm, Rad Hardened=No, Suppressor Type=TVS
J1: library part TYPE-C-31-M-12, "USB Connectors 24 Receptacle 1 8.94*7.3mm RoHS / TYPE-C-31-M-12", JLCPCB Part #=C165948, Package=Package, Check_prices=https://www.snapeda.com/parts/TYPE-C-31-M-12/HRO+Electronics+Co.%252C+Ltd./view-part/?ref=eda, MF="HRO Electronics Co., Ltd.", MP=TYPE-C-31-M-12, SnapEDA_Link=https://www.snapeda.com/parts/TYPE-C-31-M-12/HRO+Electronics+Co.%252C+Ltd./view-part/?ref=snap
L1: library part CMP-11268-000037-1, "Fixed Inductors 1uH 20% 9.6A 14.60mOhms AEC-Q200", Ambient Temperature Range High=+125°C, Ambient Temperature Range Low=-40°C, Inductance=1uH, JLCPCB Part #=C4555951, Manufacturer=Coilcraft, Package=0, Rms Current=9.6A, Saturation Current=8.7A, Self Resonant Frequency=79MHz, Series Resistance=14.6mΩ, Test Frequency=1MHz, Tolerance=20%, Automotive=Yes, Automotive Grade="Grade 1", Category=Ind, ComponentLink2Description=Datasheet, ComponentLink2URL=https://www.coilcraft.com/pdfs/xal4000.pdf, Composition=Wirewound, Core Material=Composite, Device Class L1="Passive Components", Device Class L2=Inductors, Device Class L3="Fixed Inductors", Height=2.1mm, Lead Free=Yes, Manufacturer Part Number=XAL4020-102MEC, Mouser Description="Power inductor, shielded, 20% tol, SMT, RoHS, halogen f", Octopart=https://octopart.com/xal4020-102mec-coilcraft-13142161, RoHS=TRUE, Shielding=true, Standoff Height=0.1mm
MD1: library part CMP-194065-000008-1, "RX TXRX MOD WIFI SURFACE MOUNT", Case/Package=SMD/SMT, Frequency=2.5GHz, JLCPCB Part #=C82899, Max Operating Temperature=85°C, Min Operating Temperature=-40°C, Operating Supply Voltage=3.6V, Package Quantity=550, Data Rate=150Mbps, Mount="Surface Mount", Packaging="Cut Tape", Sensitivity=-98dBm, Weight=0.088185oz
P1: library part CMP-1024-00333-1, "0.025\" SQ Post Header, Through-hole, Vertical, -55 to 125 degC, 2.54 mm Pitch, 3-Pin, Male, RoHS", JLCPCB Part #=C3335811, Manufacturer=Samtec, Temperature Range="-55 to 125 degC", ComponentLink1Description="Manufacturer URL", ComponentLink1URL=http://www.samtec.com, ComponentLink2Description=Datasheet, ComponentLink2URL=http://www.samtec.com/documents/webfiles/pdf/TSW_TH.PDF, ComponentLink3Description="Package Specification", ComponentLink3URL=http://www.samtec.com/documents/webfiles/cpdf/TSW-XXX-XX-XXX-X-XX-XXX-MKT.pdf, DatasheetVersion=F-214, Mounting Technology=Through-hole, Orientation=Vertical, PackageDescription=".025[0.64] SQ. Post Terminal Strip Assembly", PackageReference=TSW-103-07-X-S, PackageVersion="DM, 8/1988", PartNumber=TSW-103-07-G-S, Pitch="2.54 mm", RoHS=True
R1 R2: library part CMP-1659-00013-4, "RES 10kΩ 1% 0.125W 0805", JLCPCB Part #=C17414, Manufacturer=Uniroyal, Max Operating Temperature="155 degC", Min Operating Temperature="-55 degC", Package Quantity=5000, Voltage Rating="150 V", DatasheetVersion="Rev. 4, 02/2016", Height="0.5 mm", Length="2 mm", Mount="Surface Mount", Mounting Technology="Surface Mount", PackageDescription="2-Pin Surface Mounted Device, Body 2 x 1.25 mm", PackageReference=0805, Packaging="Tape and Reel", Pins=2, REACH SVHC="No SVHC", RoHSCompliant=true
  R1: MPN=0805W8F1002T5E
  R2: Manufacturer Part Number=0805W8F1002T5E
R3 R5: library part CMP-02407-007815-1, "RES Thick Film, 100kΩ, 1%, 0.33W, 100ppm/°C, 0603", Case Code (Imperial)=0603, Case Code (Metric)=1608, JLCPCB Part #=C25803, Manufacturer=Uniroyal, Max Operating Temperature=155°C, Max Power Dissipation=250mW, Min Operating Temperature=-55°C, Package Quantity=10, Resistance=100kR, Temperature Coefficient=100ppm/°C, Tolerance=1%, Voltage Rating=75V, Case/Package=0603, Composition="Thick Film", Contact Plating=Tin, Depth=0.85mm, Features="Automotive AEC-Q200", Height=0.45mm, Lead Free="Lead Free", Length=1.6mm, Manufacturer Part Number=0603WAF1003T5E, Military Standard=Not, Number of Terminations=2, Packaging="Tape and Reel", Power Rating=250mW, Radiation Hardening=No, Termination=SMD/SMT, Voltage Rating (DC)=75V, Weight=7.1E-05oz, Width=0.8mm
R4: library part CMP-2000-04127-2, "RES SMD 732K OHM 1% 1/10W 0603", Case Code (Imperial)=0603, Case Code (Metric)=1608, JLCPCB Part #=C23239, Max Operating Temperature=155°C, Max Power Dissipation=100mW, Min Operating Temperature=-55°C, Resistor Type="Thick Film", Temperature Coefficient=100ppm/°C, Tolerance=1%, Voltage Rating=50V, Case/Package=0603, Construction=Rectangular, Depth=0.8mm, Features="Moisture Resistant", Height=0.45mm, Lead Free="Lead Free", Length=1.6mm, Military Standard=Not, Number of Terminations=2, Packaging="Tape and Reel", Power Rating=100mW, RoHS Compliant=Yes, Series=RC, Size Code=0603, Termination=SMD/SMT, Voltage Rating (DC)=50V, Width=0.8mm
R6: library part CMP-2001-04375-5, "Chip Resistor, 1 KOhm, +/- 1%, 0.125 W, -55 to 155 degC, 0805 (2012 Metric), RoHS, Tape and Reel", JLCPCB Part #=C17560, Manufacturer=Panasonic, Max Operating Temperature="155 degC", Min Operating Temperature="-55 degC", Package Quantity=1, Voltage Rating="150 V", ComponentLink1Description="Manufacturer URL", ComponentLink1URL=http://www.panasonic.com/, ComponentLink2Description=Datasheet, ComponentLink2URL=http://industrial.panasonic.com/cdbs/www-data/pdf/RDA0000/AOA0000C86.pdf, DatasheetVersion=04/2015, Height="0.6 mm", Length="2 mm", Mount="Surface Mount", Mounting Technology="Surface Mount", PackageDescription="2-Pin Surface Mount Device, Body 2 x 1.25 mm", PackageReference=0805, Packaging="Cut Tape", REACH SVHC=Yes, RoHSCompliant=true
R7: library part CMP-2001-04472-1, JLCPCB Part #=C17713, Manufacturer="Vishay Dale", Part Number=CRCW080510K0FKEAHP
R8 R9: library part CMP-2000-00540-8, "RES SMD 5.1K OHM 1% 1/10W 0603", Case Code (Imperial)=0603, Case Code (Metric)=1608, JLCPCB Part #=C23186, Max Operating Temperature=155°C, Max Power Dissipation=100mW, Min Operating Temperature=-55°C, Package Quantity=1, Resistance Tolerance=1%, Resistor Type="Thick Film", Temperature Coefficient=100ppm/°C, Voltage Rating=75V, Case/Package=0603, Construction=Rectangular, Contact Plating=Tin, Depth=0.8mm, Features="Automotive AEC-Q200", Height=0.022inch, Lead Free="Lead Free", Length=1.6mm, Military Standard=Not, Mount="Surface Mount", Number of Terminations=2, Packaging="Tape and Reel", Power Rating=100mW, Radiation Hardening=No, Reach SVHC Compliant=Yes, RoHS Compliant=Yes, Series=ERJ, Size Code=0603, Termination=SMD/SMT, Tolerance=1%, Voltage Rating (DC)=75V, Weight=7.1E-05oz, Width=0.8mm
SW3: library part CMP-2000-06501-2, "SWITCH SLIDE SPDT 300MA 6V", Case/Package=100, Contact Current Rating=300mA, Contact Resistance=70mR, JLCPCB Part #=C221660, Max Operating Temperature=85°C, Max Voltage Rating (DC)=6V, Min Operating Temperature=-40°C, Package Quantity=1, Actuator Length=2mm, Actuator Material=Nylon, Actuator Type=Standard, Contact Material="Copper Alloy", Contact Plating=Silver, Current Rating=300mA, Electrical Life=5000Cycles, Housing Material=Nylon, Illumination Type=Non-Illuminated, Lead Free="Lead Free", Length=9mm, Max Current Rating=300mA, Mount="Surface Mount", Orientation="Right Angle", Packaging="Tape and Reel", Radiation Hardening=No, REACH SVHC="No SVHC", Switch Function=On-On, Switch Travel=2mm, Termination="Gull Wing", Throw Configuration=SPDT, Voltage Rating (DC)=6V
U1: library part CMP-12756-000035-1, "IC REG LINEAR 3.3V 600MA SOT25", Case/Package=SOT-23-5, Dropout Voltage=250mV, JLCPCB Part #=C51118, Max Input Voltage=6V, Max Operating Temperature=85°C, Max Output Current=600mA, Min Input Voltage=2.5V, Min Operating Temperature=-40°C, Output Voltage=3.3V, Package Quantity=1, Quiescent Current=55uA, Accuracy=1.5%, Height=1.3mm, Lead Free="Lead Free", Length=3.1mm, Mount="Surface Mount", Number of Outputs=1, Number of Pins=5, Number of Regulators=1, Output Current=600mA, Output Type=Fixed, Packaging="Tape and Reel", Polarity=Positive, Width=1.7mm
U2: library part CMP-04918-000638-1, "FINISH GOODS FOR TPS61023", JLCPCB Part #=C919459
U3: library part CMP-08107-000009-2, "IC USB TO UART BRIDGE QFN24 / CP2102N-A02-GQFN24R", Ambient Temperature Range High=85°C, JLCPCB Part #=C969151, Manufacturer Lifecycle Status="FULL PRODUCTION", Max Junction Temperature (Tj)=105°C, Max Supply Voltage=3.6V, Min Operating Temperature=-40°C, Min Supply Voltage=1.71V, Height=800µm, Interface="I2C, RS-485, UART, USB", Lifecycle Status=Production, Max Operating Temperature=85°C, NexarPartId=99772192, Number of Digital IO=4, Parameter 1=CP2102N-A02-GQFN24R, Schedule B="8542390000, 8542390000"

## Free pads (board coordinates)
  round 1.152 hole 1.152 unplated: TH(1.5,88) TH(97.9,2.1)

## Via types
v1: diameter 0.6, hole 0.3, L1 (SIGNAL) to L4 (SIGNAL), 66 vias

## Nets (pads, with @x,y where several pads share a name; then routed paths per layer and width w, separated by ;. In a path a pad name is that pad's centre, name@x,y a point inside that pad or via, vN(x,y) a via of type N, cw(c..) or ccw(c..) an arc to the next point about the centre after c; other vN are vias at no path point)
3V3: C1.2 C2.1 C4.1 C9.2 C10.2 MD1.2 R1.2 R2.1 U1.5 U3.5 U3.6 U3.7 | length 135.8
  L1 (SIGNAL) w0.3: v1(87,45.75) 88.437,45.75 U3.6 ; U3.5 88.56,46.099 U3.6 ; U3.7 88.835,45.874 U3.6
  L1 (SIGNAL) w0.5: R1.2 50.958,57.996 53.535,57.996 C1.2@56.358,57.996 ; C10.2 78.596,28.676 C9.2 ; U1.5 92.085,83.874 93.162,82.797 C4.1 C4.1@93.162,78.447
  L1 (SIGNAL) w0.8: C1.2@56.358,57.996 C1.2 59,58.174 ; MD1.2@65.2,57.154 61.305,57.154 60.285,58.174 59,58.174 ; C9.2 81.4,32.208 83.585,34.394 R2.1 v1(85.035,37.924) ; v1(87.785,67.174) 87.785,71.424 87.762,71.4 60.3,71.4 59,70.1 59,58.174 ; 87.785,71.571 93.162,76.947 C4.1@93.162,78.447
  L4 (SIGNAL) w0.3: v1(87,45.75) 92.035,45.75
  L4 (SIGNAL) w0.8: v1(85.035,37.924) 92.035,44.924 92.035,45.75 92.035,62.924 v1(87.785,67.174)
5V: C3.1 C7.1 C8.1 P1.2 R3.2 R4.2 U1.1 U1.3 U2.6 | length 103.1
  L1 (SIGNAL) w0.3: U2.6 U2.6@71.035,83.924 ; 71.035,84.674 U2.6@71.035,83.924 ; 72.035,83.924 U2.6@71.035,83.924
  L1 (SIGNAL) w0.5: P1.2@61.5,29 ccw(c61.5,29.245) P1.2@61.745,29.245 ; 71.035,84.674 R4.2@71.035,85.924 ; 72.035,83.924 72.535,83.924 ; R3.2@73.738,83.924 cw(c73.738,83.504) R3.2 R3.2@74.072,83.837 ; C8.1 C8.1@80.572,83.837 ; C3.1@83.499,83.837 C3.1 ; U1.3@86.789,81.974 U1.3 87.912,81.974 88.104,82.166 88.194,82.166 88.638,82.61 88.638,83.238 88.06,83.816 87.393,83.816 U1.1 U1.1@87.298,83.837
  L1 (SIGNAL) w0.8: P1.2@61.745,29.245 v1(61.745,35.674) ; 72.535,83.924 R3.2@73.738,83.924 ; R3.2@74.072,83.837 C7.1@77.323,83.837 ; C7.1@77.432,83.874 C8.1 ; C8.1@80.572,83.837 83.499,83.837 U1.1@87.298,83.837 ; v1(85.535,79.174) 85.535,80.72 U1.3@86.789,81.974
  L4 (SIGNAL) w0.8: 56.5,41 56.5,71.888 57.785,73.174 79.535,73.174 v1(85.535,79.174) ; 56.535,40.884 v1(61.745,35.674)
D+: D1.4 J1.A6 J1.B7 U3.3 | length 32.2
  L1 (SIGNAL) w0.3: U3.3 85.669,47.374 85.3,47.005 85.3,39.552 85.9,38.952 85.9,28.6 D1.4 85.7,28.15 86.6,27.25 88.215,27.25 90.965,24.5 J1.A6 J1.B7
D-: D1.3 J1.A7 J1.B6 U3.4 | length 29.3
  L1 (SIGNAL) w0.3: U3.4 85.976,46.874 85.8,46.698 85.8,39.759 87.6,37.959 D1.3 88.79,28.4 91.69,25.5 J1.B6 J1.A7
ESP-RXD: MD1.34 U3.21 | length 11
  L1 (SIGNAL) w0.3: MD1.34 87.28,53.429 91.035,49.674 U3.21
ESP-TXD: MD1.35 U3.20 | length 12.5
  L1 (SIGNAL) w0.3: MD1.35 87.31,54.699 91.535,50.474 U3.20
GND: BOOT.3 BOOT.4 BT2.1 C1.1 C2.2 C3.2 C4.2 C5.1 C6.2 C7.2 C8.2 C9.1 C10.1 D1.1 EN.3 EN.4 J1.A1_B12 J1.B1_A12 J1.S1 J1.S2 J1.S3 J1.S4 MD1.1 MD1.15 MD1.38 MD1.39 P1.1 R3.1 R5.1 R7.1 R8.1 R9.1 U1.2 U2.4 U3.2 U3.25 | length 146
  L1 (SIGNAL) w0.3: EN.3 EN.4 50.535,43.824 51.985,42.374 ; v1(51.535,41.924) 51.985,42.374 ; C2.2 53.535,56.924 54.837,55.622 C1.1 v1(58.234,55.622) ; C5.1 53.185,41.174 51.985,42.374 ; P1.1 64.34,33.119 71.281,33.119 ccw(c71.281,33.174) BOOT.3 BOOT.4 v1(79.285,31.985) ; MD1.1 65.75,58.509 66.22,58.039 66.345,58.039 70.35,54.034 70.35,53.359 70.865,52.844 72.7,52.844 MD1.39@74.535,52.844 ; MD1.15 67.985,42.624 74.535,49.174 72.7,49.174 70.865,49.174 70.865,51.009 72.7,51.009 74.535,51.009 MD1.39@74.535,52.844 ; U2.4 71.03,82.924 71.03,81.679 v1(71.035,81.674) ; R3.1 74.068,82.514 74.068,80.932 v1(74.1,80.9) 77.512,80.9 C7.2@77.5,80.888 ; R5.1 v1(75.535,87.174) ; C7.2 C8.2 80.659,81.047 C3.2 83.762,81.047 85.638,82.924 U1.2 ; C10.1 v1(77.8,25.7) 80.976,25.7 C9.1 85.824,26.124 D1.1 ; R8.1 R9.1 88.575,19.1 v1(93.5,19.1) 93.5,20.345 J1.S1 93.42,20.585 93.42,21.4 93.27,21.55 J1.A1_B12 ; v1(85.035,58.424) 82.285,58.424 MD1.38 80.2,58.509 MD1.39@74.535,52.844 ; v1(86.5,48.8) 87.426,47.874 89.495,47.874 90.245,47.124 U3.25 ; v1(89.035,78.674) C4.2 ; J1.B1_A12 93.27,27.95 93.42,28.1 93.42,28.915 J1.S2 ; R7.1 v1(95.45,39.45)
  L1 (SIGNAL) w0.5: v1(15.126,79.701) BT2.1@15.126,87.69 ; v1(50.785,82.424) 50.804,82.443 53.529,82.443 C6.2
  other v1: 91.3,3.5 57.1,3.6 67.9,4.3 51.2,4.9 80.4,5.1 74.6,10.6 51.2,10.9 2.2,15.6 84.5,15.9 93.4,16.2 51.1,16.3 74.8,20.2 51.5,23.5 65.8,23.8 59.1,24.5 1.7,27.6 55.4,27.8 69.1,27.8 97.2,34 64.7,36.3 2.5,44.5 60,47.8 96.8,49.8 2.4,55.7 89.2,57.5 95.6,58.3 60.3,65 95.2,65.1 51.6,65.2 2.4,65.5 72.6,70 51.7,70.1 94.8,72.3 51.3,73.8 62.1,76.7 77.2,77.2 2.2,77.8 97,78.8 96.5,85.6 50.3,85.9 92.2,86.5 53.2,87.7 78.9,88 86.3,88.2 63.6,88.9
NetBOOT_1: BOOT.1 BOOT.2 MD1.25 R2.2 | length 14.8
  L1 (SIGNAL) w0.3: BOOT.1 BOOT.2 79.535,37.924 R2.2 81.785,38.099 82.2,38.514 MD1.25
NetBT1_1: BT1.1 BT2.2 | length 22.1
  L1 (SIGNAL) w0.5: BT1.1@37.037,6.237 BT1.1@37.285,6.486
  L1 (SIGNAL) w0.75: BT2.2@15.2,5.637 BT1.1@36.937,5.637
NetBT1_2: BT1.2 SW3.2 | length 31.1
  L1 (SIGNAL) w0.5: BT1.2@37.285,85.861 BT1.2@38.973,84.174
  L1 (SIGNAL) w0.8: BT1.2 40.438,81.837 40.438,81.062 45.1,76.4 56.662,76.4 60.285,80.024 SW3.2
NetC5_2: C5.2 EN.1 EN.2 MD1.3 R1.1 | length 28.2
  L1 (SIGNAL) w0.3: R1.1@51.06,55.924 51.06,55.874 54.66,52.274 EN.1@54.785,52.274 ; C5.2 55.015,43.929 EN.2 EN.1 58.058,51.899 61.828,55.669 64.9,55.669 MD1.3
  L1 (SIGNAL) w0.8: R1.1 50.96,56.024 R1.1@51.06,55.924
NetC6_1: C6.1 L1.1 SW3.3 U2.2 U2.3 | length 22.4
  L1 (SIGNAL) w0.3: U2.2 U2.3 69.545,78.479 L1.1
  L1 (SIGNAL) w0.5: C6.1 57.435,80.148 57.785,80.498 SW3.3 57.785,81.324 58.885,82.424 69.045,82.424 U2.3
NetD1_2: D1.2 J1.A4_B9 J1.B4_A9 R6.2 | length 31.4
  L1 (SIGNAL) w0.3: v1(87.6,24.7) D1.2 ; R6.2 90.5,33.518 ; v1@91.3,33.518 90.5,33.518 ; J1.A4_B9 93.15,22.5 93.715,22.5 93.92,22.705 93.92,26.795 93.715,27 93.15,27 J1.B4_A9 92.85,27.3 92.285,27.3 90.5,29.085 90.5,33.518
  L4 (SIGNAL) w0.3: v1(87.6,24.7) 87.65,24.75 88.35,24.75 91.3,27.7 v1(91.3,33.5)
NetJ1_A5: J1.A5 R8.2 | length 9.6
  L1 (SIGNAL) w0.3: R8.2 84.625,20.725 87.4,23.5 J1.A5
NetJ1_B8: J1.B8 R9.2 | length 5.5
  L1 (SIGNAL) w0.3: R9.2 89.503,20.725 91.777,23 J1.B8
NetL1_2: L1.2 U2.5 | length 5.7
  L1 (SIGNAL) w0.3: U2.5 71.476,83.424 71.97,82.93 L1.2
NetMD1_10: MD1.10 P1.3 | length 21
  L1 (SIGNAL) w0.3: P1.3 cw(c59.26,29.055) 59.205,29.055 59.205,41.759 64.225,46.779 64.9,46.779 MD1.10
NetR4_1: R4.1 R5.2 U2.1 | length 6.4
  L1 (SIGNAL) w0.3: U2.1 69.59,83.924 69.59,85.879 69.635,85.924 69.635,86.774 70.035,87.174 R5.2
NetR6_1: R6.1 R7.2 U3.8 | length 9.8
  L1 (SIGNAL) w0.3: U3.8 90.035,40.365 R6.1 ; R6.1@90.6,39.9 92.8,37.7 R7.2
NetS1_A: 
pads on no net: BT1. BT2. J1. J1.A8 J1.B5 MD1.4 MD1.5 MD1.6 MD1.7 MD1.8 MD1.9 MD1.11 MD1.12 MD1.13 MD1.14 MD1.16 MD1.17 MD1.18 MD1.19 MD1.20 MD1.21 MD1.22 MD1.23 MD1.24 MD1.26 MD1.27 MD1.28 MD1.29 MD1.30 MD1.31 MD1.32 MD1.33 MD1.36 MD1.37 SW3. SW3.1 U1.4 U3.1 U3.9 U3.10 U3.11 U3.12 U3.13 U3.14 U3.15 U3.16 U3.17 U3.18 U3.19 U3.22 U3.23 U3.24

## Polygon pours and split planes (outlines as drawn)
GND on L2 (GND) "GND_L02_P000" (solid, pour order 0): 3,1 cw(c3,3) 1,3 1,87 cw(c3,87) 3,89 97,89 cw(c97,87) 99,87 99,2 cw(c98,2) 98,1 97,1
GND on L3 (GND) "GND_L03_P001" (solid, pour order 1): 3,1 cw(c3,3) 1,3 1,87 cw(c3,87) 3,89 97,89 cw(c97,87) 99,87 99,2 cw(c98,2) 98,1

## Other copper
L1 (SIGNAL):
  text "GPIO" at 58,26.9 h0.5
  text "5V" at 61.4,26.8 h0.5
  text "GND" at 63.6,26.8 h0.5
Multi-Layer:
  pour cut-out: 65.786,59.459 cw(c65.258,62.763) 62,62 62,66 cw(c65.858,65.022) 66,69 81.5,69 cw(c82,65.5) 85.5,66 85.5,62 cw(c82.5,62.5) 82.5,59.459

## Silkscreen, mask and mechanical layers (free items; w line width, h text height)
Top Overlay:
  lines w0.254: 54,6.5 71.5,6.5 71.5,22 54,22 54,6.5
  text "Servo" at 58.5,15.5 h1.52
  text "Motor" at 58.754,13.254 h1.52
  text "Daniel Mehany" at 78.459,12.762 h1.52
  text "Setup" at 58.754,10.762 h1.52
  text "ESP32 Switch" at 68.299,8.9 h1.52
  text "Flipper" at 87.854,6.562 h1.52
Mechanical 1:
  lines w0.3: 0,89.824 0,0 100,0 100,89.824 99.824,90 0.176,90

## Text inside footprints (layer, text, board x,y; h text height)
J1: Top 3D Body "PCB EDGE" at 99.65,29.95 h0.61 r90